# Altium PCB PCB2.PcbDoc
Units mil, origin at the board's own origin, x right, y up, seen from the top; angles counter-clockwise.
Board outline 5905.51 x 3149.61 mil, 2 copper layers (Top Layer, Bottom Layer); 7 components, 56 nets, 46 pads, 0 vias.
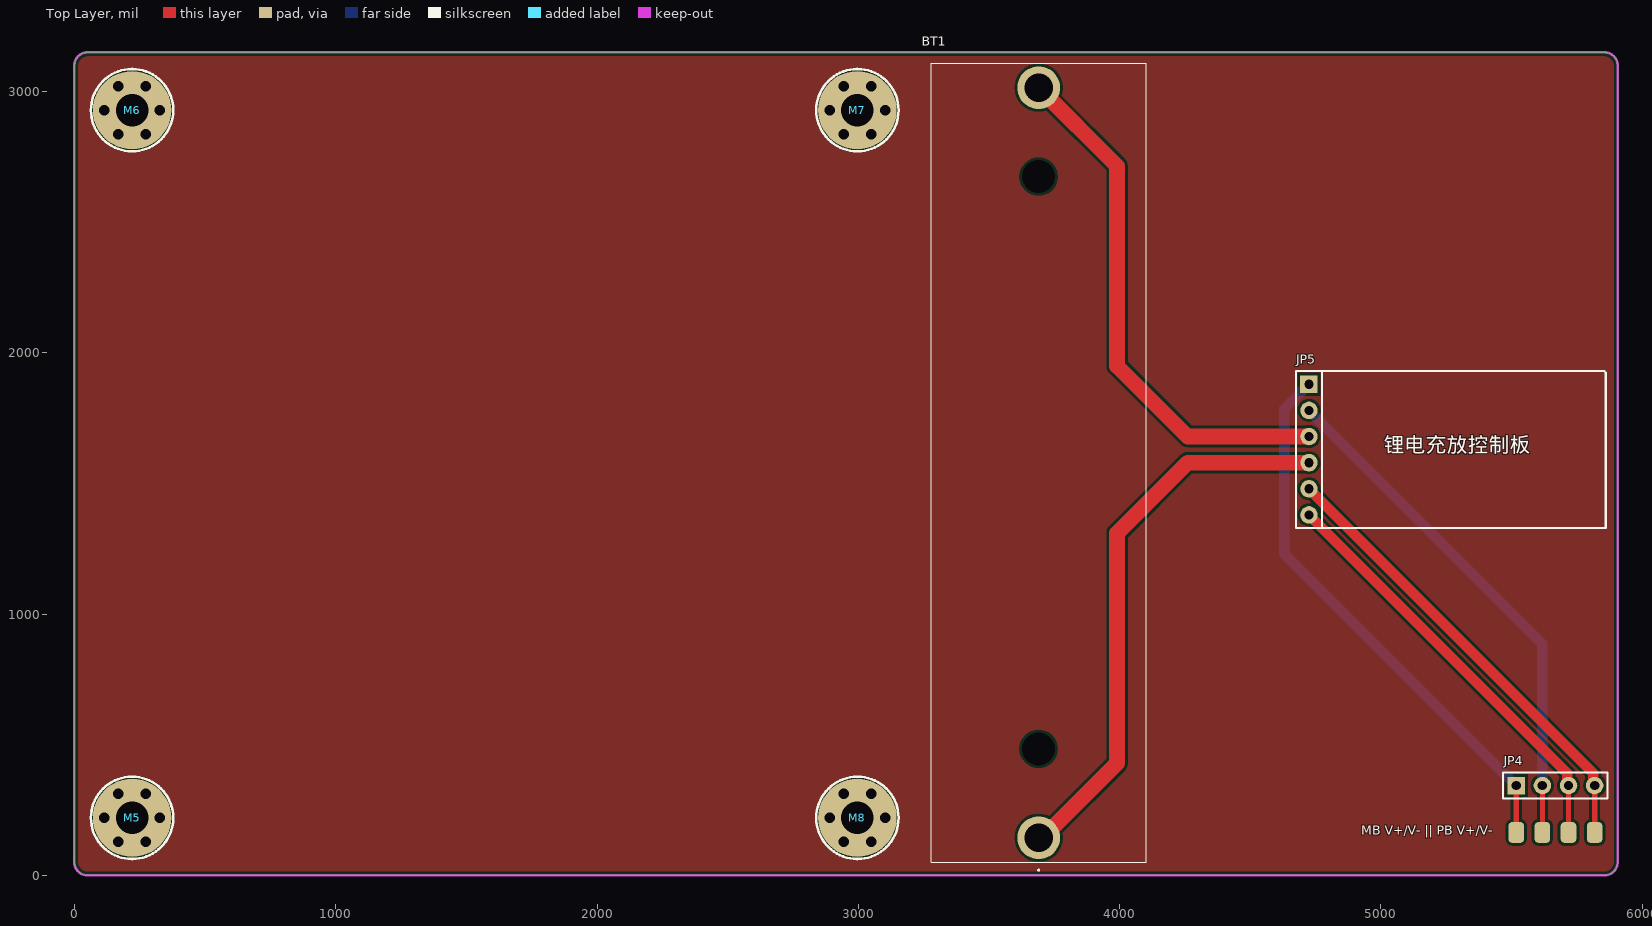
[diagram p0: Top Layer view]
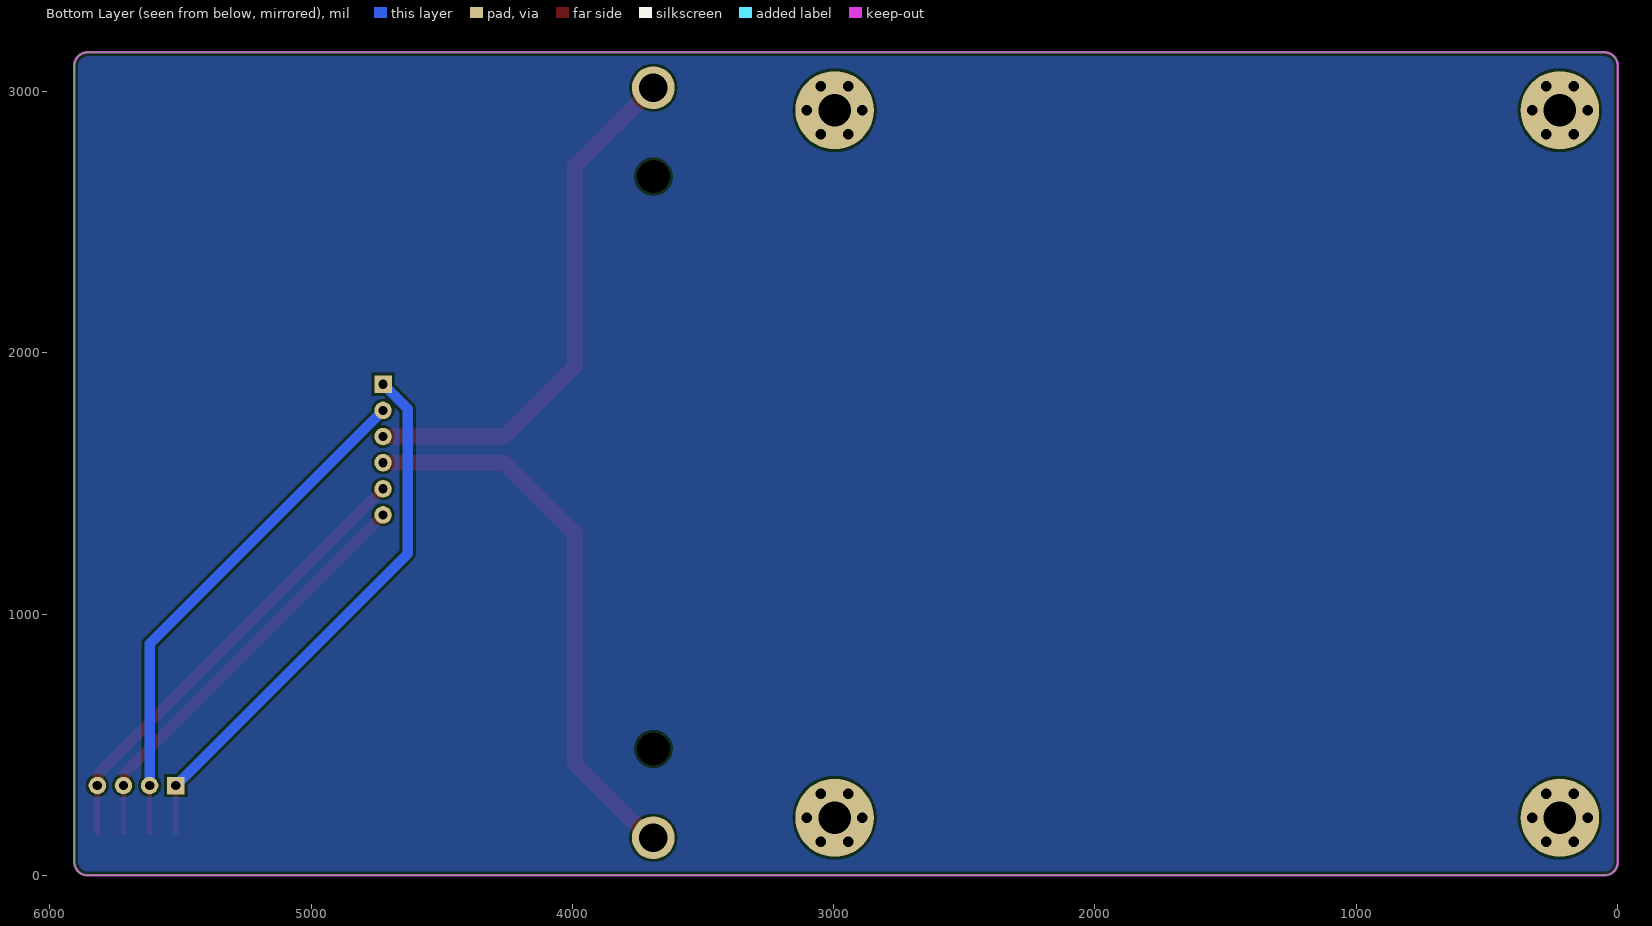
[diagram p1: Bottom Layer view, seen from below]

## Layer stack, top to bottom
Top Solder: solder mask 0.4, Solder Resist, Dk 3.5
Top Layer: signal copper 1.4
Dielectric 1: dielectric 12.6, FR-4, Dk 4.8
Bottom Layer: signal copper 1.4
Bottom Solder: solder mask 0.4, Solder Resist, Dk 3.5

## Board outline
50,0.39 cw(c50,50.39) 0,50.39 0,3100 cw(c50,3100) 50,3150 5855.51,3150 cw(c5855.51,3100) 5905.51,3100 5905.51,50.61 5905.3,50.39 cw(c5855.3,50.39) 5855.3,0.39

## Design rules (kind name [scope] priority, off if disabled: settings)
Clearance [All] p1: gap=10 ignorepadtopadclearanceinfootprint=FALSE except(0: Arc-Hole Track-Hole SMDPad-Hole THPad-Hole Via-Hole Fill-Hole Poly-Hole Region-Hole Text-Hole)
PolygonConnect [All] p1: connectstyle=Relief reliefconductorwidth=10 reliefentries=4 polygonreliefangle="90 Angle" airgapwidth=10
RoutingVias [All] p1: holewidth=28 width=50 viastyle="Through Hole" minholewidth=28 minwidth=50 maxholewidth=28 maxwidth=50
SolderMaskExpansion [All] p1: expansion=4
Width [All] p1: maxlimit=60 minlimit=10 preferedwidth=12
30 further rules are at their usual default settings.

## Components (designator, comment, footprint, x,y, rotation, side; value= is the part's Value field where it differs from the comment)
BT1 "18650" 18650_battery 3690,144.65 r90 top
JP4 "HDR-1X4" HDR2.54-M-LI-4P 5667.56,344.41 r0 top
JP5 "HDR-1X6" HDR2.54-M-LI-6P 4724.41,1630 r270 top
M5 "M3" M3x20_N 220.83,220.81 r0 top
M6 "M3" M3x20_N 220.83,2928.77 r0 top
M7 "M3" M3x20_N 2996.43,2928.77 r0 top
M8 "M3" M3x20_N 2996.43,220.81 r0 top

## Footprints (in the part's own frame and the unit in brackets; to place one, negate y for a bottom-side part, rotate by r counter-clockwise, add the part's x,y. Pads: shape width x height; smd on the part's side, far side on the other; paste and mask are expansions set on the pad)
18650_battery [mm] "小糖豆的小窝窝 https://item.taobao.com/item.htm?ft=t&id=613637044352"
  round 4.155 hole 2.77: 1(0,0) 2(72.9,0)
  round 1.6 hole 3.2 unplated: MH1(8.645,0) MH2(64.255,0)
  silkscreen extent -3.2,-10.45 75.3,10.45, body extent -2.38,-10.41 75.27,10.39, height 21.83
HDR2.54-M-LI-4P [mm] "排母，4脚"
  rect 1.7x1.7 hole 0.9: 1(-3.81,0)
  round 1.7 hole 0.9: 2(-1.27,0) 3(1.27,0) 4(3.81,0)
  silkscreen extent -5.08,-1.27 5.08,1.27, body extent -5.08,-1.27 5.08,1.27, height 8.5
HDR2.54-M-LI-6P [mm] "排母，6脚"
  rect 1.7x1.7 hole 0.9: 1(-6.35,0)
  round 1.7 hole 0.9: 2(-3.81,0) 3(-1.27,0) 4(1.27,0) 5(3.81,0) 6(6.35,0)
  silkscreen extent -7.62,-1.27 7.62,1.27, body extent -7.62,-1.27 7.62,1.27, height 8.5
M3x20_N [mil] "M3铜柱，长：20mm"
  round 40 hole 40: 1(-106,0) 1(-53,-91.8) 1(-53,91.8) 1(53,-91.8) 1(53,91.8) 1(106,0)
  round 300 hole 125: 1(0,0)
  silkscreen extent -157,-157 157,157, body extent -106,-93 106,93, height 789

## Part data
BT1: "Battery", BOM名称=1865, 下单链接=https://item.taobao.com/item.htm?ft=t&id=613637044, 淘宝ID=小糖豆
JP4: library part "Header 4", "4P接插件", BOM名称=4P接, 下单链接=https://item.taobao.com/item.htm?ft=t&id=613637044, 淘宝ID=小糖豆
JP5: library part "Header 6", "6P接插件", BOM名称=6P接, 下单链接=https://item.taobao.com/item.htm?ft=t&id=613637044, 淘宝ID=小糖豆
M5 M6 M7 M8: "铜柱孔", BOM名称=ͭ, 下单链接=https://item.taobao.com/item.htm?ft=t&id=613637044, 淘宝ID=小糖豆

## Free pads (board coordinates)
  rrect50% 60x80 smd: 6(5517.56,165) 6(5617.56,165) 6(5717.56,165) 6(5817.56,165)

## Nets (pads, with @x,y where several pads share a name; then routed paths per layer and width w, separated by ;. In a path a pad name is that pad's centre, name@x,y a point inside that pad or via, vN(x,y) a via of type N, cw(c..) or ccw(c..) an arc to the next point about the centre after c; other vN are vias at no path point)
"BT V+": BT1.1 JP5.4 | length 2144.4
  Top Layer w60: BT1.1 3704.65,144.65 3990,430 3990,1310 4260,1580 JP5.4
"BT V-": BT1.2 JP5.3 | length 2035.2
  Top Layer w60: BT1.2 3990,2714.72 3990,1950 4260,1680 JP5.3
D+: 
D-: 
Fan: 
GND: 
"MB V+": JP4.1 JP5.1 pad.6@5517.56,165 | length 2121.7
  Top Layer w20: pad.6@5517.56,165 JP4.1
  Bottom Layer w40: JP5.1 4630,1785.59 4630,1231.97 JP4.1
"MB V-": JP4.2 JP5.2 pad.6@5617.56,165 | length 1985
  Top Layer w20: pad.6@5617.56,165 JP4.2
  Bottom Layer w40: JP5.2 5617.56,886.85 JP4.2
NetD1_2: 
NetL1_1: 
NetL2_1: 
NetL3_1: 
NetL4_1: 
NetL5_1: 
NetL6_1: 
NetQ1_1: 
NetQ2_1: 
NetQ3_1: 
NetQ4_1: 
NetR1_1: 
NetR2_1: 
NetR3_1: 
P0.0: 
P0.1: 
P0.2: 
P0.3: 
P0.4: 
P0.5: 
P0.6: 
P0.7: 
P1.0: 
P1.1: 
P1.2: 
P1.3: 
P1.4: 
P2.0: 
P2.1: 
P2.2: 
P2.3: 
P2.4: 
P2.5: 
P2.6: 
P2.7: 
"PB V+": JP4.3 JP5.6 pad.6@5717.56,165 | length 1626.4
  Top Layer w20: pad.6@5717.56,165 JP4.3
  Top Layer w40: JP5.6 5712.41,392 5712.41,349.56 JP4.3
"PB V-": JP4.4 JP5.5 pad.6@5817.56,165 | length 1767.8
  Top Layer w20: pad.6@5817.56,165 JP4.4
  Top Layer w40: JP5.5 5812.41,392 5812.41,349.56 JP4.4
RST: 
RXD: 
SEGL: 
SEGR: 
TXD: 
V3: 
VCC: 
VIn: 
Water: 
XTAL1: 
XTAL2: 
pads on no net: BT1.MH1 BT1.MH2 M5.1 M6.1 M7.1 M8.1

## Polygon pours and split planes (outlines as drawn)
no net on Top Layer "Top Layer-No Net" (solid, pour order 4): 0,3100 cw(c50,3100) 50,3150 5855.51,3150 cw(c5855.51,3100) 5905.51,3100 5905.51,50.61 cw(c5855.3,50.61) 5855.3,0.39 50,0.39 cw(c50,50.39) 0,50.39
no net on Bottom Layer "Bottom Layer-No Net" (solid, pour order 6): 0,3100 cw(c50,3100) 50,3150 5855.51,3150 cw(c5855.51,3100) 5905.51,3100 5905.51,50.61 cw(c5855.3,50.61) 5855.3,0.39 50,0.39 cw(c50,50.39) 0,50.39

## Keep-outs
Keep-Out Layer:
  lines w10: 5905.3,50.39 cw(c5855.3,50.39) 5855.3,0.39 50,0.39 cw(c50,50.39) 0,50.39 0,3100 cw(c50,3100) 50,3150 5855.51,3150 cw(c5855.51,3100) 5905.51,3100 5905.51,50.61

## Silkscreen, mask and mechanical layers (free items; w line width, h text height)
Top Overlay:
  lines w8: 4774.41,1330 5860,1330 5860,1925 5855,1930 4774.41,1930
  text "锂电充放控制板" at 5010,1600 h100
  text "MB V+/V- || PB V+/V-" at 4925,145 h60
Mechanical 1:
  lines w10: 5905.3,50.39 cw(c5855.3,50.39) 5855.3,0.39 50,0.39 cw(c50,50.39) 0,50.39 0,3100 cw(c50,3100) 50,3150 5855.51,3150 cw(c5855.51,3100) 5905.51,3100 5905.51,50.61

## Dimensions
50,0.39 to 50,3150 on Mechanical 1
5905.51,50.61 to 0,50.39 on Mechanical 1